# EAGLE board DIPDAP (EAGLE 7.6.0)
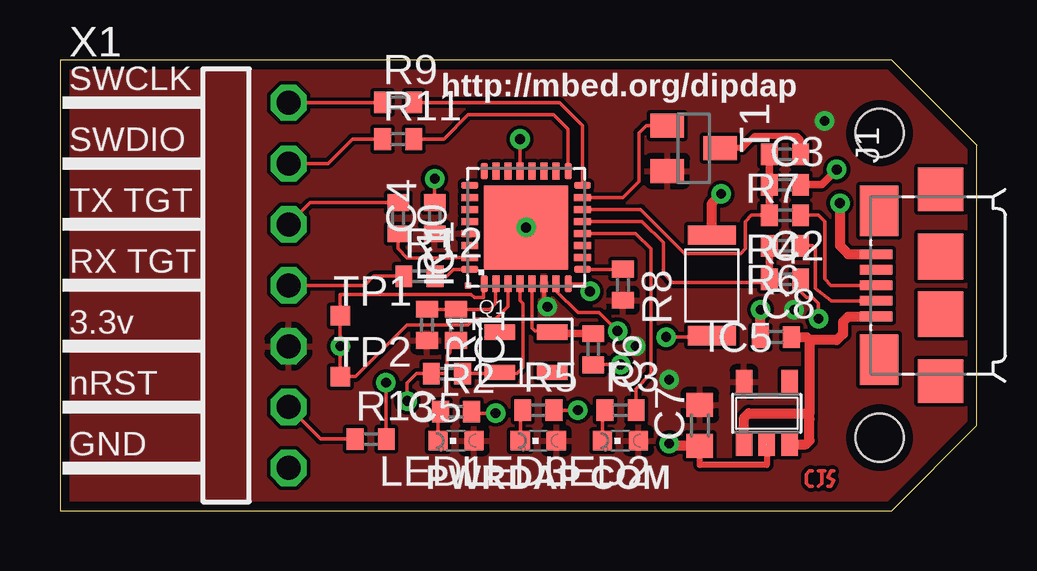
[diagram p0: board, top side]
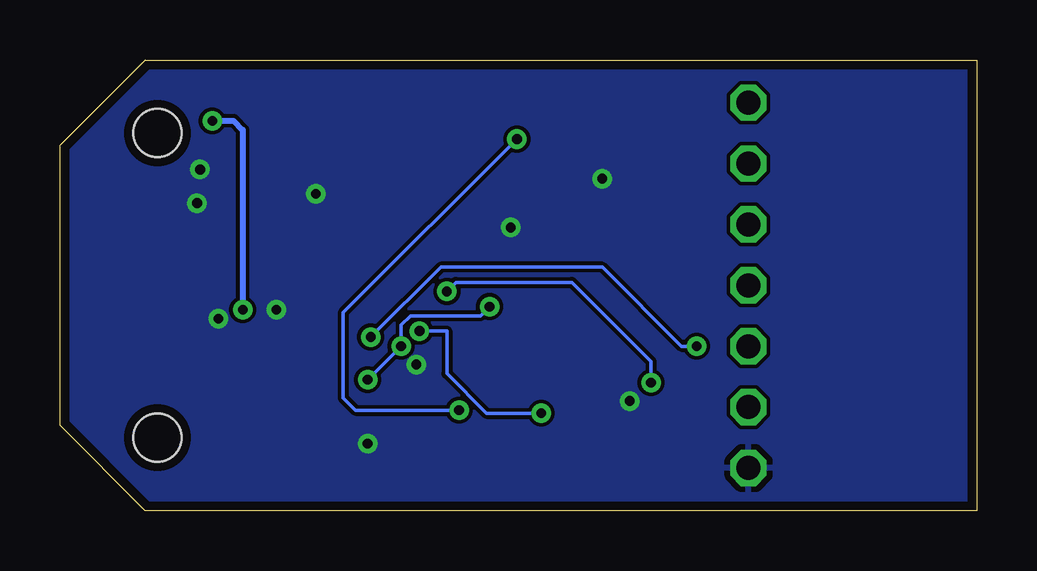
[diagram p1: board, bottom side, seen from below]

Size 38.23 x 18.8 mm. Coordinates in mm from the lower left corner, seen from the top.
Outline: 38.23,3.56 38.23,15.24 34.67,18.8 0,18.8 0,0 34.67,0 38.23,3.56
Copper layers (1*16): Top 0.035mm / dielectric 1.5mm / Bottom 0.035mm
Design rules "default": minimum track width 6mil, minimum drill 15mil, track to track 6mil, track to pad 6mil, pad to pad 6mil, via to via 6mil, smd to smd 6mil, copper to edge 15mil, drill to drill 8mil, minimum pad ring 10mil, minimum via ring 8mil, stop-mask expansion 4mil, vias tented up to drill 0mil, thermal gap 10mil
Holes 2 mm at 34.16,3.05 34.16,15.75

## Footprints (pad centres in the part's own frame; a part is rotated, then mirrored left to right if it is on the bottom)
0402 = smd 0.7 x 0.9: 1 -0.65,0; 2 0.65,0
0603 = smd 1 x 1.1: 1 -0.85,0; 2 0.85,0
HVQFN33 = smd 0.7 x 0.28: 1 -2.35,1.75; 2 -2.35,1.25; 3 -2.35,0.75; 4 -2.35,0.25; 5 -2.35,-0.25; 6 -2.35,-0.75; 7 -2.35,-1.25; 8 -2.35,-1.75; 17 2.35,-1.75; 18 2.35,-1.25; 19 2.35,-0.75; 20 2.35,-0.25; 21 2.35,0.25; 22 2.35,0.75; 23 2.35,1.25; 24 2.35,1.75 | smd 0.28 x 0.7: 9 -1.75,-2.35; 10 -1.25,-2.35; 11 -0.75,-2.35; 12 -0.25,-2.35; 13 0.25,-2.35; 14 0.75,-2.35; 15 1.25,-2.35; 16 1.75,-2.35; 25 1.75,2.35; 26 1.25,2.35; 27 0.75,2.35; 28 0.25,2.35; 29 -0.25,2.35; 30 -0.75,2.35; 31 -1.25,2.35; 32 -1.75,2.35 | smd 3.5 x 3.5: EXP 0,0 | smd 0.25 x 0.25: M1 -2.415,2.415
SOT23-5 = smd 0.69 x 0.99: 1 -0.95,-1.29; 2 0,-1.29; 3 0.95,-1.29; 4 0.95,1.3; 5 -0.95,1.3
ZX62-B-5PA(11) = smd 0.4 x 1.35: 1 -1.3,2.675; 2 -0.65,2.675; 3 0,2.675; 4 0.65,2.675; 5 1.3,2.675 | smd 2.1 x 1.6: SH1 -3.1,2.55; SH2 3.1,2.55 | smd 1.8 x 1.9: SH3 -4,0; SH6 4,0 | smd 1.9 x 1.9: SH4 -1.2,0; SH5 1.2,0
CHIPLED_0603 = smd 0.8 x 0.8: A 0,-0.75; C 0,0.75
3.2X.2.5 = smd 1.27 x 0.635: P$1 -1.092,-0.838; P$2 1.092,-0.838; P$3 1.092,0.838; P$4 -1.092,0.838
SKRKAEE010 = smd 0.8 x 2: P$1 -2.1,0; P$2 2.1,0
SOT23 = smd 1 x 1.4: 1 -0.95,-1.1; 2 0.95,-1.1; 3 0,1.1
TP08SQ = smd 0.8 x 0.8: TP 0,0
TSW-107-02-S-S-RA-MBED = drill 1 pad 1.5 octagon: 1 7.62,1.524; 2 5.08,1.524; 3 2.54,1.524; 4 0,1.524; 5 -2.54,1.524; 6 -5.08,1.524; 7 -7.62,1.524

## Placement (x,y rotation side)
C1  100nF  [0402]  16.51,7.75 270 top
C2  18pF  [0402]  30.23,9.65 0 top
C3  18pF  [0402]  30.23,13.59 0 top
C4  100nF  [0402]  15.62,12.19 90 top
C5  18pF  [0402]  16.13,5.71 180 top
C6  18pF  [0402]  22.23,6.73 270 top
C7  10uF  [0603]  26.67,3.56 90 top
C8  1uF  [0402]  29.85,7.24 0 top
IC1  [HVQFN33]  19.43,11.81 90 top
IC5  [SOT23-5]  29.46,4.06 0 top
J1  ZX62-B-5PA  [ZX62-B-5PA(11)]  36.7,9.4 90 top
LED1  RED  [CHIPLED_0603]  16.51,2.92 90 top
LED2  RED  [CHIPLED_0603]  23.37,2.92 90 top
LED3  RED  [CHIPLED_0603]  19.94,2.92 90 top
Q1  12MHz  [3.2X.2.5]  19.43,6.6 0 top
R1  10k  [0402]  15.3,7.75 270 top
R2  470R  [0402]  16.51,4.13 0 top
R3  470R  [0402]  23.37,4.19 0 top
R4  33R  [0402]  30.23,12.32 180 top
R5  470R  [0402]  19.94,4.19 0 top
R6  33R  [0402]  30.23,11.05 180 top
R7  1k5  [0402]  30.23,14.86 180 top
R8  10k  [0402]  23.47,9.42 270 top
R9  470R  [0402]  14.1,17.02 0 top
R10  470R  [0402]  14.1,12.19 270 top
R11  470R  [0402]  14.1,15.49 0 top
R12  470R  [0402]  14.99,9.78 0 top
R13  470R  [0402]  12.95,2.98 0 top
SW1  SPST_SKRKAWW010  [SKRKAEE010]  27.18,9.4 270 top
T1  BSS84  [SOT23]  26.42,15.11 270 top
TP1  TPTP08SQ  [TP08SQ]  11.68,8.13 0 top
TP2  TPTP08SQ  [TP08SQ]  11.68,5.59 0 top
X1  TSW-107-02-S-S-MBED  [TSW-107-02-S-S-RA-MBED]  8,9.4 270 top

## Library data of the parts
C1-C8 IC1 IC5 LED1-LED3 Q1 R1-R13 T1 = mbed-HDK
J1 = hirose
SW1 = mbed-switches
TP1 TP2 = testpad
X1 = mbed-connectors

## Nets
+3,3V: C4.1 C7.2 IC1.6 IC1.29 IC5.5 LED1.A LED2.A LED3.A R1.2 R8.2 T1.2 X1.3
GND: C1.2 C2.2 C3.2 C4.2 C5.2 C6.2 C7.1 C8.1 IC1.EXP IC5.2 J1.5 SW1.P$1 X1.1
HID: IC1.12 R3.2
IF_NRESET: C1.1 IC1.2 R1.1
ISP: IC1.1 IC1.3 SW1.P$2 TP1.TP TP2.TP
MSD: IC1.7 R2.2
N$1: C3.1 IC1.14 R4.2 R7.2
N$2: C2.1 IC1.13 R6.2
N$3: J1.2 R6.1
N$4: J1.3 R4.1
N$5: LED1.C R2.1
N$6: R7.1 T1.3
N$7: IC1.9 R8.1
N$8: LED2.C R3.1
N$9: LED3.C R5.1
N$12: C6.1 IC1.5 Q1.P$3
N$14: C5.1 IC1.4 Q1.P$1
N$19: IC1.15 T1.1
N$20: IC1.32 R12.2
N$22: IC1.31 R10.2
TGT_NRESET: IC1.8 R13.2
TGT_NRESET_BUF: R13.1 X1.2
TGT_RX: R12.1 X1.4
TGT_SWCLK: IC1.16 R9.2
TGT_SWCLK_BUF: R9.1 X1.7
TGT_SWDIO: IC1.17 R11.2
TGT_SWDIO_BUF: R11.1 X1.6
TGT_TX: R10.1 X1.5
UART: IC1.21 R5.2
VBUS: C8.2 IC5.1 IC5.3 J1.1

## Tracks (layer width: path | path; a pad name or v marks a point on that pad's centre or on a via)
+3,3V  (via drill 0.41)
  Top 0.152: IC1.6 20.18,8.65 v20.32,8.51
  Bottom 0.152: v20.32,8.51 20.7,8.13 23.62,8.13 24,7.75 v24,6.86 v25.4,5.46
  Bottom 0.254: v31.88,16.26 30.99,16.26 30.61,15.88 v30.61,8.38
  pour Top: -0.38,19.18 -0.38,-0.25 39.24,-0.25 39.24,19.18
GND  (via drill 0.41)
  Top 0.152: C1.2 16.26,6.84 16.26,6.6 16.13,6.48 16.13,5.84 16,5.71 C5.2 14.86,5.71 14.48,5.33 v14.48,4.57 | C4.2 v15.62,13.84 15.38,14.08 | C6.2 22.24,6.1 v23.37,6.1 | C2.2 30.88,9.13 31.11,8.89 31.37,8.89 31.62,8.64 v31.62,8
  Top 0.254: IC5.2 29.46,1.9 26.67,1.9 C7.1
  Top 0.305: v32.39,14.22 31.75,13.59 C3.2
  Top 0.406: C7.1 25.4,2.71 v25.4,2.79 | C7.1 26.8,2.71 | 26.71,2.67 C7.1 | C8.1 29.19,8.37 v29.21,8.38 | 32.51,14.1 v32.39,14.22 | v32.51,12.83 32.51,11.05 32.86,10.7 J1.5 | SW1.P$1 27.18,12.83 v27.56,13.21
  other vias: 19.43,11.81
  pour Bottom: -0.38,-0.25 39.24,-0.25 39.24,19.18 -0.38,19.18
HID
  Top 0.152: IC1.12 24,11.56 24.64,10.92 24.64,5.71 24,5.08 24,4.21 R3.2
IF_NRESET
  Top 0.152: R1.1 C1.1 17.92,8.4 18.16,8.64 18.16,9.44 IC1.2
ISP  (via drill 0.41)
  Top 0.152: IC1.1 17.65,9.46 17.65,8.89 17.27,8.89 17.14,9.02 11.68,9.02 TP1.TP v11.68,6.86 TP2.TP 12.32,5.59 14.48,7.75 17.02,7.75 17.27,8 18.16,8 18.68,8.52 IC1.3 | v25.27,7.24 27.05,7.24 SW1.P$2
  Bottom 0.152: v25.27,7.24 22.35,10.16 15.62,10.16 12.32,6.86 v11.68,6.86
MSD  (via drill 0.41)
  Top 0.152: IC1.7 20.68,9.16 21.59,8.25 22.48,8.25 v23.24,7.49 | v18.16,4.06 17.22,4.06 R2.2
  Bottom 0.152: v23.24,7.49 22.1,7.49 22.1,5.71 20.45,4.06 v18.16,4.06
N$1
  Top 0.152: IC1.14 24.21,12.56 26.04,10.73 28.38,10.73 28.57,10.92 28.57,12.06 28.83,12.32 R4.2 29.27,12.32
  Top 0.305: R4.2 C3.1 R7.2
N$2
  Top 0.152: IC1.13 24.26,12.06 25.15,11.18 25.15,9.91 25.53,9.53 29.45,9.53 C2.1
  Top 0.305: R6.2 C2.1
N$3
  Top 0.152: R6.1 31.37,11.05 31.5,10.92 31.5,9.91 31.5,9.78 31.5,9.27 32.13,8.76 32.15,8.75 J1.2
N$4
  Top 0.152: R4.1 31.62,12.32 31.88,12.06 31.88,9.65 32.13,9.4 J1.3
N$5
  Top 0.152: LED1.C 15.76,3.9 R2.1
N$6
  Top 0.254: R7.1 30.88,15.48 30.73,15.62 28.96,15.62 28.45,15.11 T1.3
N$7
  Top 0.152: IC1.9 23.46,10.06 R8.1
N$8
  Top 0.152: LED2.C 22.62,4.09 R3.1
N$9
  Top 0.152: LED3.C 19.19,4.09 R5.1
N$11
  Top 0.152: 31.37,1.65 31.24,1.65 31.11,1.52 31.11,1.14 31.24,1.02 31.37,1.02
N$12
  Top 0.152: IC1.5 19.68,7.62 19.81,7.49 20.47,7.49 Q1.P$3
  Top 0.305: Q1.P$3 20.58,7.38 C6.1
N$13
  Top 0.152: 31.62,1.65 31.75,1.65 | 31.75,1.65 31.88,1.65 | 31.75,1.65 31.75,1.14 31.62,1.02
N$14
  Top 0.152: IC1.4 19.18,8.76 19.3,8.64 19.31,5.97 19.05,5.71 18.39,5.71 Q1.P$1 18.29,5.71 C5.1
N$15
  Top 0.152: 32.26,1.65 32.13,1.65 32,1.4 32.26,1.27 32.13,1.02 32,1.02
N$19
  Top 0.152: IC1.15 23.48,13.06 24.13,13.72 24.13,15.75 24.38,16 24.45,16.06 T1.1
N$20
  Top 0.152: R12.2 16.13,9.78 16.41,10.06 IC1.32
N$22
  Top 0.152: IC1.31 16.36,10.56 16.38,10.54 14.48,10.54 14.1,10.92 R10.2
TGT_NRESET  (via drill 0.41)
  Top 0.152: IC1.8 21.78,9.46 v22.1,9.14 | R13.2 13.6,5.32 v13.59,5.33
  Bottom 0.152: v22.1,9.14 21.72,9.53 16.89,9.53 13.59,6.22 v13.59,5.33
TGT_NRESET_BUF
  Top 0.152: R13.1 10.86,2.98 X1.2
TGT_RX
  Top 0.152: R12.1 13.08,9.78 12.7,9.4 X1.4
TGT_SWCLK
  Top 0.152: IC1.16 21.78,16.06 20.83,17.02 R9.2
TGT_SWCLK_BUF
  Top 0.152: X1.7 R9.1
TGT_SWDIO
  Top 0.152: IC1.17 21.18,15.9 20.57,16.51 17.02,16.51 16,15.49 R11.2
TGT_SWDIO_BUF
  Top 0.152: R11.1 12.19,15.49 11.18,14.48 X1.6
TGT_TX
  Top 0.152: X1.5 10.43,12.84 R10.1
UART  (via drill 0.41)
  Top 0.152: IC1.21 v19.18,15.49 | v21.59,4.19 R5.2
  Bottom 0.152: v19.18,15.49 26.42,8.25 26.42,4.7 25.91,4.19 v21.59,4.19
VBUS
  Top 0.406: IC5.1 28.51,3.88 28.7,4.06 31.24,4.06 | IC5.3 31.1,2.77 31.24,2.92 31.24,3.81 31.24,4.06 | C8.2 31.11,7.24 31.24,7.11 | 31.24,7.11 31.24,4.06 | 31.24,7.11 32.39,7.11 32.64,7.37 32.64,7.87 32.86,8.1 J1.1

## Text on the board
TopSilkscreen: SWCLK | http://mbed.org/dipdap | SWDIO | TX TGT | RX TGT | 3.3v | nRST | GND | PWR | DAP | COM
BottomSilkscreen: SWCLK | http://mbed.org/dipdap | SWDIO | TX TGT | RX TGT | USB CMSIS-DAP Interface | for DIP Microcontrollers | 3.3v | nRST | GND